# Altium PCB 顶板PCB.PcbDoc
Units mm, origin at the board's own origin, x right, y up, seen from the top; angles counter-clockwise.
Board outline 241.28 x 80 mm, 2 copper layers (Top Layer, Bottom Layer); 9 components, 40 nets, 133 pads, 93 vias.
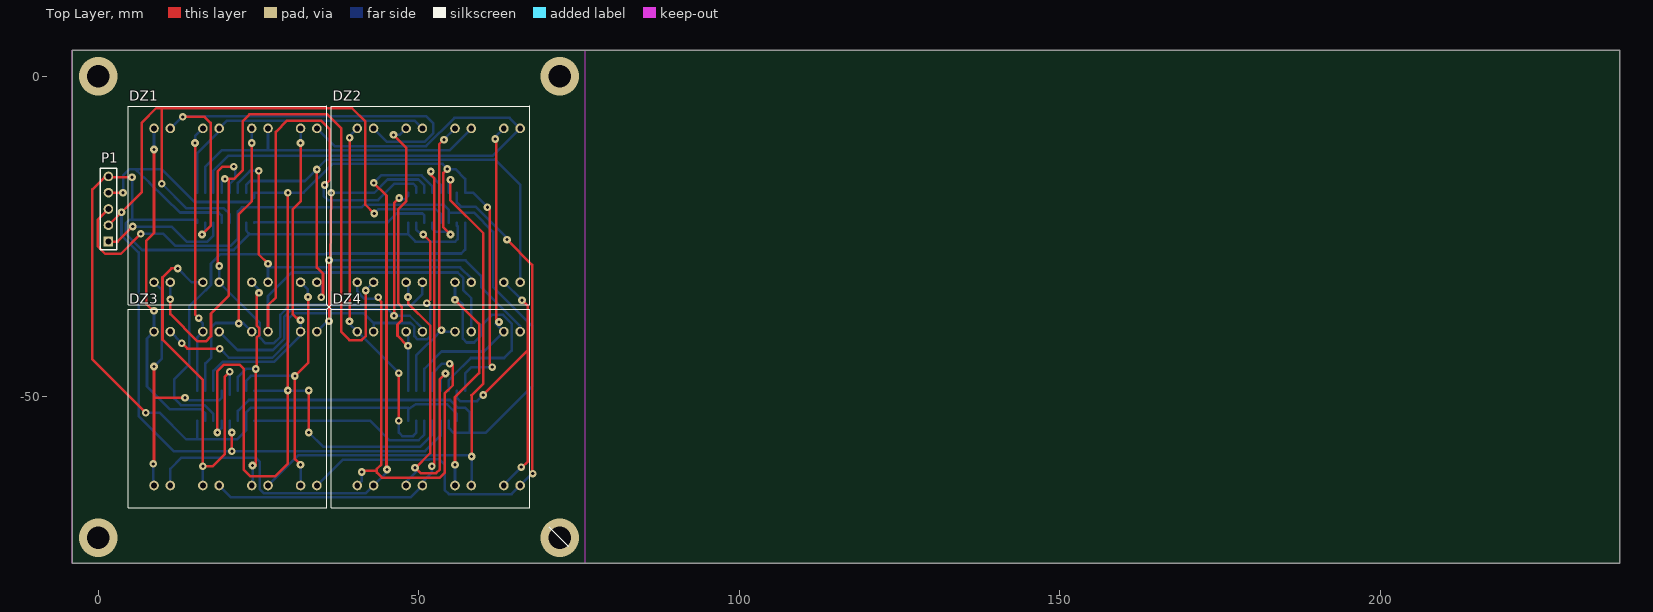
[diagram p0: Top Layer view]
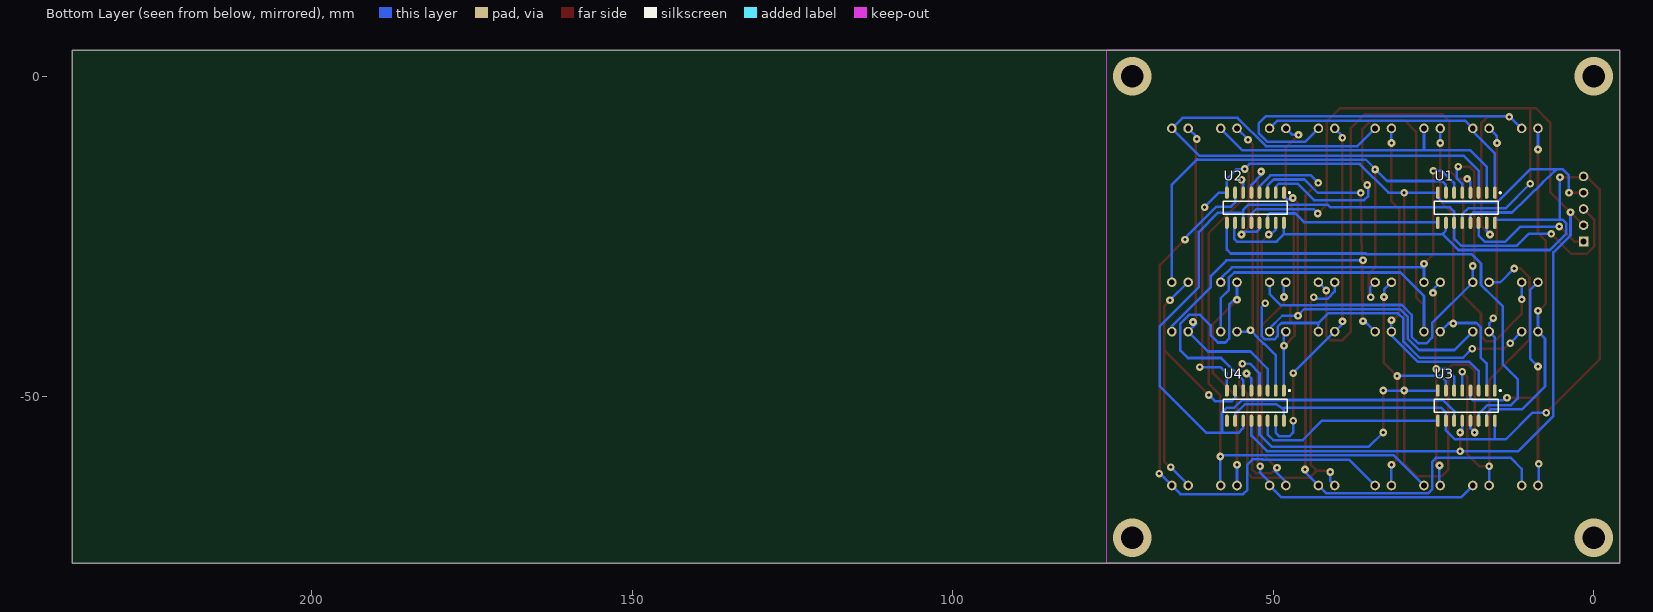
[diagram p1: Bottom Layer view, seen from below]

## Layer stack, top to bottom
Top Solder: solder mask 0.0102, Solder Resist, Dk 3.5
Top Layer: signal copper 0.0356
Dielectric 1: dielectric 0.32, FR-4, Dk 4.8
Bottom Layer: signal copper 0.0356
Bottom Solder: solder mask 0.0102, Solder Resist, Dk 3.5

## Board outline
-4,-76 -4,4 237.285,4 237.285,-76

## Design rules (kind name [scope] priority, off if disabled: settings)
Clearance Clearance_ft [InPolygon] p1: gap=1
Clearance [All] p2: gap=0.254
PolygonConnect [All] p1: connectstyle=Relief reliefconductorwidth=0.254 reliefentries=4 polygonreliefangle="90 Angle" airgapwidth=0.254
RoutingVias [All] p1: holewidth=0.711 width=1.27 viastyle="Through Hole" minholewidth=0.711 minwidth=1.27 maxholewidth=0.711 maxwidth=1.27
SolderMaskExpansion [All] p1: expansion=0.102
Width [All] p1: maxlimit=0.4 minlimit=0.254 preferedwidth=0.4
30 further rules are at their usual default settings.

## Classes and differential pairs
component class 顶板原理图: DZ1 DZ3 P1 U1 U2 U3 U4

## Components (designator, comment, footprint, x,y, rotation, side; value= is the part's Value field where it differs from the comment)
DZ1 "DianZhen" DianZhen 8.72,-8.15 r0 top
DZ2 "DianZhen" DianZhen 40.42,-8.15 r0 top
DZ3 "DianZhen" DianZhen 8.72,-39.85 r0 top
DZ4 "DianZhen" DianZhen 40.42,-39.85 r0 top
P1 "Header 5" HDR1X5 1.608,-25.803 r90 top
U1 "74HC595" SOIC16_L 19.896,-20.532 r270 bottom
U2 "74HC595" SOIC16_L 52.789,-20.532 r270 bottom
U3 "74HC595" SOIC16_L 19.896,-51.393 r270 bottom
U4 "74HC595" SOIC16_L 52.789,-51.393 r270 bottom

## Footprints (in the part's own frame and the unit in brackets; to place one, negate y for a bottom-side part, rotate by r counter-clockwise, add the part's x,y. Pads: shape width x height; smd on the part's side, far side on the other; paste and mask are expansions set on the pad)
DianZhen [mm]
  round 1.5 hole 0.9: 1(0,0) 2(2.54,0) 3(7.62,0) 4(10.16,0) 5(15.24,0) 6(17.78,0) 7(22.86,0) 8(25.4,0) 9(0,-24) 10(2.54,-24) 11(7.62,-24) 12(10.16,-24) 13(15.24,-24) 14(17.78,-24) 15(22.86,-24) 16(25.4,-24)
  silkscreen extent -4.06,-27.49 26.92,3.5
HDR1X5 [mm] "Connector; Header; 5 Position"
  rect 1.5x1.5 hole 0.9: 1(0,0)
  round 1.5 hole 0.9: 2(2.54,0) 3(5.08,0) 4(7.62,0) 5(10.16,0)
  silkscreen extent -1.27,-1.27 11.43,1.27
SOIC16_L [mm] "SOIC, 16-Leads, Body 9.9x3.9mm, Pitch 1.27mm, IPC High Density"
  oval 1.9x0.6 smd: 1(-2.35,4.445) 2(-2.35,3.175) 3(-2.35,1.905) 4(-2.35,0.635) 5(-2.35,-0.635) 6(-2.35,-1.905) 7(-2.35,-3.175) 8(-2.35,-4.445) 9(2.35,-4.445) 10(2.35,-3.175) 11(2.35,-1.905) 12(2.35,-0.635) 13(2.35,0.635) 14(2.35,1.905) 15(2.35,3.175) 16(2.35,4.445)
  silkscreen extent -2.47,-5 1,5.42, body extent -2,-5 2,5, height 1.91

## Part data
P1: "Header, 5-Pin"

## Via types
v1: diameter 1.2, hole 0.5, Top Layer to Bottom Layer, 89 vias
v2: diameter 6, hole 3.5, Top Layer to Bottom Layer, 4 vias

## Nets (pads, with @x,y where several pads share a name; then routed paths per layer and width w, separated by ;. In a path a pad name is that pad's centre, name@x,y a point inside that pad or via, vN(x,y) a via of type N, cw(c..) or ccw(c..) an arc to the next point about the centre after c; other vN are vias at no path point)
DS: P1.1 U1.14 | length 20.7
  Top Layer w0.4: P1.1 3.056,-25.803 v1(5.393,-23.466)
  Bottom Layer w0.4: v1(5.393,-23.466) 11.463,-23.466 13.807,-25.81 17.038,-25.81 17.991,-24.857 U1.14
GND: P1.4 U1.8 U1.13 U2.8 U2.13 U3.8 U3.13 U4.8 U4.13 | length 258.7
  Top Layer w0.4: P1.4 3.64,-18.183 3.894,-17.929 v1(3.894,-18.183) ; v1(18.601,-55.572) 18.601,-46.021 19.588,-45.034 22.109,-45.034 22.741,-45.666 22.741,-61.414 23.706,-62.379 27.643,-62.379 29.599,-60.423 v1(29.599,-49.043) v1(29.599,-18.183) ; v1(32.85,-55.572) v1(32.85,-49.043) ; v1(54.44,-14.5) 53.859,-15.081 53.859,-23.596 v1(54.973,-24.711) ; v1(60.714,-20.444) 61.069,-20.799 61.069,-44.98 v1(61.476,-45.386)
  Bottom Layer w0.4: v1(3.894,-18.183) 3.894,-15.516 4.898,-14.512 5.818,-14.512 6.715,-15.383 ; 6.721,-15.389 6.715,-15.383 ; 7.992,-16.625 6.715,-15.383 ; 8.014,-16.645 12.771,-21.269 18.791,-21.269 19.261,-21.739 U1.13 ; v1(18.601,-55.572) 19.261,-54.911 U3.13 ; U3.8 v1(29.599,-49.043) v1(32.85,-49.043) ; v1(32.85,-55.572) 35.117,-57.839 50.217,-57.839 52.154,-55.902 U4.13 ; U2.13 52.154,-23.822 52.637,-24.304 54.567,-24.304 v1(54.973,-24.711) ; U4.8 57.234,-46.402 58.25,-45.386 v1(61.476,-45.386) ; U2.8 58.453,-18.183 v1(60.714,-20.444) ; U2.8 57.234,-16.024 55.71,-14.5 v1(54.44,-14.5) 54.44,-14.43 53.71,-13.7 36.551,-13.7 32.068,-18.183 v1(29.599,-18.183) U1.8 24.341,-18.945 23.649,-19.637 15.051,-19.637 9.951,-14.537 5.844,-14.537 6.715,-15.383
HANG1: DZ1.1 DZ3.1 U3.15 | length 53.8
  Top Layer w0.4: v1@8.72,-36.725 7.501,-35.506 7.501,-25.682 8.72,-24.463 v1(8.72,-11.452)
  Bottom Layer w0.4: v1(8.72,-36.598) DZ3.1 7.628,-40.942 7.628,-48.384 11.209,-51.965 16.086,-51.965 16.721,-52.6 U3.15 ; v1(8.72,-11.452) DZ1.1
HANG2: DZ1.3 DZ3.3 U3.1 | length 42.3
  Top Layer w0.4: v1(15.121,-10.436) 15.121,-37.157 v1(15.705,-37.741)
  Bottom Layer w0.4: v1(15.121,-10.436) 15.121,-9.369 DZ1.3 ; U3.1 15.451,-40.739 DZ3.3 16.34,-38.58 15.705,-37.945 v1(15.705,-37.741)
HANG3: DZ1.5 DZ3.5 U3.2 | length 48.7
  Top Layer w0.4: v1(21.928,-38.58) 21.928,-21.561 23.96,-19.529 v1(23.96,-10.436)
  Bottom Layer w0.4: U3.2 16.721,-44.802 17.661,-43.862 17.661,-39.163 18.321,-38.503 22.613,-38.503 DZ3.5 ; v1(23.96,-10.436) DZ1.5
HANG4: DZ1.7 DZ3.7 U3.3 | length 52
  Top Layer w0.4: v1@31.262,-37.678 30.881,-37.678 30.361,-37.157 30.361,-20.748 31.58,-19.529 v1(31.58,-10.436)
  Bottom Layer w0.4: U3.3 17.991,-45.996 19.41,-44.577 27.447,-44.577 31.58,-40.444 DZ3.7 v1(31.58,-38.057) ; v1(31.58,-10.436) DZ1.7
HANG5: DZ1.9 DZ3.9 U3.4 | length 44.9
  Top Layer w0.4: v1@8.72,-60.474 8.72,-50.314 ; v1(8.72,-45.285) 8.72,-50.314 ; v1(13.546,-50.154) 8.88,-50.154 8.72,-50.314
  Bottom Layer w0.4: v1(8.593,-60.474) 8.593,-63.723 DZ3.9 ; v1(8.72,-45.285) 9.939,-44.066 9.939,-33.369 DZ1.9 ; v1(13.546,-50.154) 13.673,-50.027 14.214,-50.568 18.88,-50.568 19.261,-50.187 U3.4
HANG6: DZ1.11 DZ3.11 U3.5 | length 63.8
  Top Layer w0.4: v1(12.428,-29.994) 11.438,-29.994 10.041,-31.391 10.041,-41.108 16.34,-47.407 v1(16.34,-60.855) 17.861,-60.855 19.772,-58.944 19.772,-46.882 v1(20.531,-46.123)
  Bottom Layer w0.4: v1(12.428,-29.994) 14.584,-32.15 DZ1.11 ; DZ3.11 v1(16.34,-60.855) ; U3.5@20.531,-49.679 U3.5 v1(20.531,-46.123)
HANG7: DZ1.13 DZ3.13 U3.6 | length 39.3
  Top Layer w0.4: DZ1.13@23.96,-32.407 DZ1.13 ; v1(24.087,-60.728) 24.595,-60.728 v1(24.595,-45.666) 24.722,-45.666 24.722,-40.791 25.164,-40.349 25.164,-39.351 24.722,-38.909 24.722,-34.083 v1@25.179,-33.626
  Bottom Layer w0.4: U3.6 21.801,-46.91 23.046,-45.666 v1(24.595,-45.666) ; DZ3.13 24.087,-63.723 v1(24.087,-60.728) ; DZ1.13 25.103,-33.293 v1(25.103,-33.804)
HANG8: DZ1.15 DZ3.15 U3.7 | length 42.9
  Top Layer w0.4: v1(31.58,-60.601) 30.691,-59.712 v1(30.691,-46.758) 32.799,-44.65 v1@32.799,-34.439
  Bottom Layer w0.4: U3.7 23.071,-47.52 23.833,-46.758 v1(30.691,-46.758) ; DZ3.15 v1(31.58,-60.601) ; DZ1.15 32.723,-33.293 v1(32.723,-34.439)
HANG9: DZ2.1 DZ4.1 U4.15 | length 56.6
  Top Layer w0.4: v1(39.2,-38.249) 39.216,-38.233 39.216,-9.619 v1(39.226,-9.609) ; DZ4.1 DZ4.1@40.42,-39.469 ; v1(46.896,-53.743) v1(46.896,-46.326)
  Bottom Layer w0.4: v1(39.2,-38.249) 39.2,-38.63 DZ4.1 v1(46.896,-46.326) ; v1(39.226,-9.609) 39.226,-9.396 39.2,-9.37 DZ2.1 ; v1(46.896,-53.743) 46.896,-55.597 47.436,-56.137 49.125,-56.137 49.614,-55.648 U4.15
HANG10: DZ2.3 DZ4.3 U4.1 | length 47.1
  Top Layer w0.4: v1(46.058,-9.166) 48.04,-11.148 48.04,-19.528 46.814,-20.755 46.814,-35.449 47.328,-35.963 47.328,-38.122 46.693,-38.757 46.693,-40.472 48.28,-42.059 v1(48.344,-42.059)
  Bottom Layer w0.4: v1(46.058,-9.166) 47.024,-9.166 DZ2.3 ; DZ4.3 48.344,-40.154 v1(48.344,-42.059) U4.1
HANG11: DZ2.5 DZ4.5 U4.2 | length 45.9
  Top Layer w0.4: v1@53.357,-39.85 53.205,-39.698 53.205,-10.605 v1@53.884,-9.926
  Bottom Layer w0.4: U4.2 49.614,-43.583 51.475,-41.722 51.536,-41.722 52.452,-40.806 52.452,-40.745 53.347,-39.85 DZ4.5 ; v1@53.884,-9.926 DZ2.5
  other v1: 53.551,-39.646 53.932,-9.928
HANG12: DZ2.7 DZ4.7 U4.3 | length 52.2
  Top Layer w0.4: v1@61.933,-9.497 v1(61.933,-9.801) ; v1@62.06,-9.801 v1(61.933,-9.801) ; v1@62.314,-38.376 62.076,-38.138 62.076,-9.658 v1(61.933,-9.801)
  Bottom Layer w0.4: U4.3 50.884,-45.639 53.575,-42.948 60.182,-42.948 DZ4.7 62.06,-38.63 62.328,-38.362 v1(62.518,-38.362) ; v1(61.933,-9.801) 61.933,-9.497 DZ2.7
HANG13: DZ2.9 DZ4.9 U4.4 | length 73
  Top Layer w0.4: v1(41.105,-61.744) 41.283,-61.566 43.49,-61.566 ; v1(43.696,-34.501) 43.696,-34.744 44.164,-35.212 44.164,-60.56 43.49,-61.234 43.49,-61.566 ; v1(54.821,-44.853) 55.075,-44.853 55.329,-45.107 55.329,-48.212 54.059,-49.482 54.059,-61.871 53.297,-62.633 44.269,-62.633 43.49,-61.855 43.49,-61.566
  Bottom Layer w0.4: DZ4.9 41.105,-63.165 v1(41.105,-61.744) ; DZ2.9 40.42,-33.627 41.486,-34.693 43.505,-34.693 v1(43.696,-34.501) ; U4.4 52.154,-46.361 53.662,-44.853 v1(54.821,-44.853)
HANG14: DZ2.11 DZ4.11 U4.5 | length 58.3
  Top Layer w0.4: DZ4.11 DZ4.11@48.04,-63.445 ; v1(48.344,-34.439) 48.344,-35.455 51.798,-38.909 51.798,-58.798 49.501,-61.095 v1@49.473,-61.095 ; v1(49.411,-61.095) v1@49.473,-61.095 ; v1(54.186,-46.377) 53.297,-47.266 53.297,-61.342 52.73,-61.909 50.287,-61.909 v1@49.473,-61.095
  Bottom Layer w0.4: DZ4.11 48.04,-63.318 49.741,-61.617 49.411,-61.287 v1(49.411,-61.095) ; DZ2.11 48.344,-32.454 v1(48.344,-34.439) ; U4.5 53.424,-47.139 v1(54.186,-46.377)
HANG15: DZ2.13 DZ4.13 U4.6 | length 70.3
  Top Layer w0.4: v1(55.66,-60.601) 55.66,-50.063 59.418,-46.304 59.418,-38.655 v1(55.66,-34.897)
  Bottom Layer w0.4: U4.6 54.694,-47.409 55.275,-46.828 55.275,-46.812 58.123,-43.964 63.33,-43.964 64.498,-42.796 64.498,-38.6 63.143,-37.245 61.413,-37.245 59.774,-38.884 59.774,-40.408 58.631,-41.551 57.488,-41.551 56.878,-40.941 56.878,-35.607 56.168,-34.897 v1(55.66,-34.897) DZ2.13 ; DZ4.13 v1(55.66,-60.601)
HANG16: DZ2.15 DZ4.15 U4.7 | length 50.7
  Top Layer w0.4: v1(60.053,-49.73) 67.038,-42.745 ; v1@66.073,-61.058 67.038,-60.092 67.038,-42.745 ; v1(66.124,-34.947) 67.038,-35.861 67.038,-42.745
  Bottom Layer w0.4: U4.7 55.964,-50.193 56.466,-50.695 59.088,-50.695 v1(60.053,-49.73) ; DZ4.15 63.28,-63.699 v1(65.997,-60.982) ; DZ2.15 63.327,-32.15 v1(66.124,-34.947) v1@66.124,-35.074
LIE1: DZ1.2 DZ2.2 U1.15 | length 79.2
  Top Layer w0.4: v1(13.216,-6.358) 16.608,-6.358 17.559,-7.31 17.559,-23.365 v1(16.213,-24.711)
  Bottom Layer w0.4: DZ1.2 13.052,-6.358 v1(13.216,-6.358) 13.282,-6.292 51.185,-6.292 52.281,-7.388 52.281,-8.876 50.886,-10.271 45.081,-10.271 DZ2.2 ; v1(16.213,-24.711) 16.721,-24.203 U1.15
LIE2: DZ1.4 DZ2.4 U1.1 | length 44.1
  Bottom Layer w0.4: U1.1 15.451,-12.048 18.88,-8.619 DZ1.4 20.084,-6.946 49.376,-6.946 DZ2.4
LIE3: DZ1.6 DZ2.6 U1.2 | length 51.4
  Bottom Layer w0.4: U1.2 16.721,-14.119 19.261,-11.579 26.5,-11.579 ; DZ1.6 26.5,-11.579 ; DZ2.6 54.771,-11.579 26.5,-11.579
LIE4: DZ1.8 DZ2.8 U1.3 | length 89.4
  Bottom Layer w0.4: U1.3 17.991,-14.754 20.353,-12.392 61.578,-12.392 DZ2.8 64.169,-6.499 55.583,-6.499 51.157,-10.925 36.895,-10.925 DZ1.8
LIE5: DZ1.10 DZ2.10 U1.4 | length 115.1
  Top Layer w0.4: v1(11.26,-34.82) 11.26,-37.106 15.527,-41.373 16.797,-41.373 17.61,-40.56 17.61,-37.03 20.371,-34.269 20.371,-16.154 ; v1(19.769,-16.024) 21.187,-16.024 22.563,-14.648 22.563,-7.007 23.604,-5.966 35.746,-5.966 37.93,-8.15 37.93,-39.9 39.2,-41.17 41.105,-41.17 41.74,-40.535 v1(41.74,-33.423)
  Bottom Layer w0.4: v1(11.26,-34.82) DZ1.10 ; U1.4 19.261,-16.405 19.858,-15.808 20.074,-16.024 v1(19.769,-16.024) ; v1(41.74,-33.423) 41.74,-33.37 DZ2.10
LIE6: DZ1.12 DZ2.12 U1.5 | length 68.7
  Top Layer w0.4: v1(18.88,-29.613) 18.68,-29.413 18.68,-14.827 19.388,-14.119 v1(21.166,-14.119)
  Bottom Layer w0.4: v1(18.88,-29.613) DZ1.12 25.23,-38.5 25.23,-40.789 26.119,-41.678 27.389,-41.678 28.405,-40.662 28.405,-37.233 29.943,-35.695 43.156,-35.695 43.17,-35.709 48.852,-35.709 50.58,-33.981 DZ2.12 ; U1.5 20.531,-16.802 21.366,-15.967 21.366,-14.319 v1(21.166,-14.119)
LIE7: DZ1.14 DZ2.14 U1.6 | length 56.5
  Top Layer w0.4: v1(25.052,-14.782) 25.052,-27.81 v1(26.5,-29.257)
  Bottom Layer w0.4: U1.6 21.801,-16.659 23.678,-14.782 v1(25.052,-14.782) ; DZ1.14 v1@26.5,-29.835 ; v1(26.5,-29.257) v1@26.5,-29.835 ; DZ2.14 58.2,-31.595 56.44,-29.835 v1@26.5,-29.835
LIE8: DZ1.16 DZ2.16 U1.7 | length 86.6
  Top Layer w0.4: DZ1.16 DZ1.16@34.25,-32.28 ; v1@34.25,-14.681 v1(34.12,-14.551) 34.12,-29.867 35.07,-30.817 35.07,-34.505 35.041,-34.476 v1(34.806,-34.476)
  Bottom Layer w0.4: U1.7 23.071,-16.99 23.706,-16.355 32.265,-16.355 35.574,-13.046 61.849,-13.046 61.901,-12.994 65.82,-16.914 DZ2.16 ; DZ1.16 34.882,-32.912 34.882,-34.4 v1(34.806,-34.476) ; v1(34.12,-14.551) v1@34.448,-14.879
LIE9: DZ3.2 DZ4.2 U2.15 | length 70.5
  Top Layer w0.4: v1@13.063,-41.653 13.926,-42.516 v1(18.982,-42.516) ; v1(50.706,-24.711) 51.798,-25.803 51.798,-34.871 v1(51.24,-35.43)
  Bottom Layer w0.4: DZ3.2 13.038,-41.628 v1(13.038,-41.678) ; v1(18.982,-42.516) 20.388,-43.923 27.176,-43.923 29.713,-41.386 29.713,-37.83 30.54,-37.003 41.46,-37.003 42.96,-38.503 ; DZ4.2 42.96,-38.503 ; U2.15 49.614,-23.898 50.427,-24.711 v1(50.706,-24.711) ; v1(51.24,-35.43) 51.798,-35.988 51.798,-40.535 51.265,-41.068 49.843,-41.068 49.309,-40.535 49.309,-39.087 48.725,-38.503 42.96,-38.503
LIE10: DZ3.4 DZ4.4 U2.1 | length 59.8
  Top Layer w0.4: v1@46.16,-36.979 46.16,-19.783 v1(46.947,-18.996)
  Bottom Layer w0.4: DZ3.4 21.743,-42.713 27.279,-42.713 29.059,-40.933 29.059,-37.504 30.214,-36.349 42.885,-36.349 42.9,-36.363 45.188,-36.363 46.135,-37.31 v1(46.135,-37.372) 48.602,-37.372 50.58,-39.349 DZ4.4 ; v1(46.947,-18.996) 47.15,-19.199 47.836,-19.199 48.344,-18.691 U2.1
LIE11: DZ3.6 DZ4.6 U2.2 | length 115.9
  Top Layer w0.4: DZ3.6 26.5,-35.734 27.719,-34.515 27.719,-8.683 29.472,-6.931 34.755,-6.931 36.152,-8.328 36.152,-16.176 v1(35.339,-16.989)
  Bottom Layer w0.4: DZ3.6 26.5,-34.313 30.184,-30.629 56.091,-30.629 56.98,-31.518 56.98,-33.423 58.2,-34.643 DZ4.6 ; v1(35.339,-16.989) 35.161,-17.167 35.161,-18.691 35.822,-19.351 43.674,-19.351 46.247,-16.778 49.149,-16.778 49.614,-17.243 U2.2
LIE12: DZ3.8 DZ4.8 U2.3 | length 84.2
  Top Layer w0.4: v1(36.025,-28.724) 36.025,-37.793 36.101,-37.869 36.213,-29.183 36.219,-28.727 v1(36.355,-18.208)
  Bottom Layer w0.4: DZ3.8 34.17,-39.85 35.81,-38.21 v1(36,-38.21) ; v1(36.025,-28.724) 57.31,-28.724 59.749,-31.162 59.749,-32.926 65.82,-38.997 DZ4.8 ; v1(36.355,-18.208) 43.07,-18.208 45.155,-16.124 49.968,-16.124 50.884,-17.04 U2.3
LIE13: DZ3.10 DZ4.10 U2.4 | length 100.6
  Top Layer w0.4: v1(42.975,-16.65) 44.977,-18.651 44.977,-61.298 v1(45.042,-61.363)
  Bottom Layer w0.4: DZ3.10 11.26,-61.236 12.95,-59.546 20.424,-59.546 20.425,-59.547 21.298,-59.547 21.299,-59.546 24.621,-59.546 25.23,-60.155 25.23,-64.462 25.822,-65.054 41.756,-65.054 DZ4.10 45.042,-61.768 v1(45.042,-61.363) ; v1(42.975,-16.65) 44.155,-15.47 50.441,-15.47 52.154,-17.183 U2.4
LIE14: DZ3.12 DZ4.12 U2.5 | length 87.4
  Top Layer w0.4: DZ4.12 DZ4.12@50.58,-63.318 ; v1(51.9,-14.881) 51.9,-15.44 52.452,-15.992 52.452,-35.142 52.408,-35.186 52.408,-38.594 52.452,-38.639 52.452,-60.474 v1@52.053,-60.874 ; v1(52.053,-60.841) v1@52.053,-60.874 ; v1@52.053,-60.874 52.053,-60.925 52.027,-60.899 v1@52.053,-60.874
  Bottom Layer w0.4: DZ3.12 20.738,-65.708 48.722,-65.708 DZ4.12 ; DZ4.12@50.58,-63.318 52.104,-61.794 52.053,-61.744 v1(52.053,-60.841) ; v1(51.9,-14.881) 51.9,-15.44 53.424,-16.964 U2.5
LIE15: DZ3.14 DZ4.14 U2.6 | length 86.6
  Top Layer w0.4: v1(54.948,-16.151) 54.948,-19.377 60.079,-24.508 60.079,-47.912 58.2,-49.79 58.25,-49.84 v1(58.25,-59.331)
  Bottom Layer w0.4: DZ3.14 31.203,-59.147 51.332,-59.147 51.345,-59.133 58.052,-59.133 v1(58.25,-59.331) 58.25,-63.8 DZ4.14 ; U2.6 54.694,-16.405 v1(54.948,-16.151)
LIE17: DZ3.16 DZ4.16 U2.7 | length 91.2
  Top Layer w0.4: v1(63.762,-25.498) 67.699,-29.435 v1@67.699,-61.973
  Bottom Layer w0.4: DZ3.16 38.169,-59.801 51.602,-59.801 51.616,-59.787 53.245,-59.787 54.059,-60.601 54.059,-64.538 54.719,-65.198 64.472,-65.198 DZ4.16 67.672,-61.998 v1(67.775,-61.998) ; U2.7 55.964,-19.707 56.599,-20.342 58.885,-20.342 63.762,-25.219 v1(63.762,-25.498)
NetU1_9: U1.9 U2.14 | length 28.5
  Bottom Layer w0.4: U1.9 24.341,-22.785 45.215,-22.785 46.568,-21.432 50.577,-21.432 50.884,-21.739 U2.14
NetU2_9: U2.9 U3.14 | length 76.3
  Bottom Layer w0.4: U3.14 17.991,-52.702 16.6,-51.311 12.892,-51.311 11.895,-50.314 11.895,-47.266 14.181,-44.98 14.181,-35.963 16.79,-33.354 16.839,-33.354 17.61,-32.583 17.61,-29.232 19.07,-27.772 35.486,-27.772 35.588,-27.67 56.637,-27.67 57.234,-27.073 U2.9
NetU3_9: U3.9 U4.14 | length 30.3
  Bottom Layer w0.4: U3.9 42.375,-53.743 45.423,-56.791 49.995,-56.791 50.884,-55.902 U4.14
SH_CP: P1.3 U1.11 U2.11 U3.11 U4.11 | length 165.9
  Top Layer w0.4: P1.3 -0.043,-22.374 -0.043,-26.565 1.1,-27.708 3.538,-27.708 v1(6.637,-24.609)
  Bottom Layer w0.4: v1(6.637,-24.609) 10.193,-24.609 12.048,-26.464 20.632,-26.464 21.801,-25.295 U1.11 21.801,-21.104 22.436,-20.469 41.105,-20.469 41.48,-20.094 53.938,-20.094 54.694,-20.85 54.694,-21.358 ; U3.11 21.801,-52.219 23.503,-50.517 54.897,-50.517 56.091,-51.711 57.209,-51.711 57.996,-52.498 57.996,-55.648 ; U4.11 54.694,-54.911 55.431,-55.648 57.996,-55.648 ; U2.11 54.694,-21.358 ; 54.694,-21.358 54.745,-21.307 58.631,-21.307 61.603,-24.279 61.603,-32.89 67.699,-38.986 67.699,-48.4 60.451,-55.648 57.996,-55.648
ST_CP: P1.2 U1.12 U2.12 U3.12 U4.12 | length 197.9
  Top Layer w0.4: P1.2 6.815,-18.056 6.815,-7.261 9.064,-5.012 39.618,-5.012 41.689,-7.083 41.689,-20.063 v1(43.061,-21.434) ; v1(9.939,-16.786) 9.939,-5.356 ; v1(20.861,-58.493) v1(20.861,-55.572)
  Bottom Layer w0.4: v1(3.65,-21.231) 3.65,-24.826 6.331,-27.507 6.331,-53.038 11.785,-58.493 v1(20.861,-58.493) 50.986,-58.493 53.424,-56.054 U4.12 ; v1(9.939,-16.786) 13.768,-20.615 19.61,-20.615 20.531,-21.536 U1.12 ; U3.12 20.531,-55.242 v1(20.861,-55.572) ; v1(43.061,-21.434) 43.747,-20.748 52.662,-20.748 53.424,-21.51 U2.12
VCC: P1.5 U1.10 U1.16 U2.10 U2.16 U3.10 U3.16 U4.10 U4.16 | length 187.6
  Top Layer w0.4: v1(5.291,-15.77) 1.735,-15.77 P1.5 1.125,-15.643 -0.907,-17.675 -0.907,-44.167 v1(7.425,-52.498)
  Bottom Layer w0.4: v1(5.291,-15.77) 5.291,-22.374 15.451,-22.374 U1.16 ; 5.294,-22.377 4.91,-22.377 4.304,-22.984 4.304,-24.555 6.866,-27.118 21.121,-27.118 23.482,-24.757 23.482,-24.539 ; v1(7.425,-52.498) 9.584,-52.498 13.749,-56.664 15.197,-56.664 ; U3.16 15.451,-56.661 ; U1.10 23.071,-24.025 23.482,-24.539 ; U4.16 48.344,-51.965 ; U2.16 48.344,-24.66 ; U4.10 55.964,-52.727 54.415,-51.178 49.567,-51.178 48.344,-51.965 ; U2.10 55.964,-23.327 56.074,-23.438 56.074,-25.435 55.7,-25.81 49.494,-25.81 48.344,-24.66 ; 15.197,-56.664 15.194,-56.661 15.451,-56.661 ; 15.197,-56.664 15.451,-56.664 15.451,-56.661 ; 15.451,-56.661 21.674,-56.661 23.071,-55.264 U3.10 23.071,-52.473 23.833,-51.711 48.344,-51.711 48.344,-51.965 ; 23.482,-24.539 23.488,-24.533 23.579,-24.66 ; 23.482,-24.539 23.579,-24.66 ; 23.579,-24.66 48.344,-24.66
pads on no net: U4.9
copper on no net:
  other v2: 0,-72 72,-72 0,0 72,0

## Keep-outs
Keep-Out Layer:
  lines w0.1: -4,-76 76,-76 76,4 -4,4 -4,-76

## Silkscreen, mask and mechanical layers (free items; w line width, h text height)
Top Overlay:
  lines w0.1: 35.626,-36.362 35.638,-36.362 36.362,-35.638 ; 35.638,-35.638 36.362,-36.362 ; 70.29,-70.29 73.338,-73.338